# Altium PCB PCB2.PcbDoc
Units mm, origin at the board's own origin, x right, y up, seen from the top; angles counter-clockwise.
Board outline 144.78 x 62.86 mm, 2 copper layers (Top Layer, Bottom Layer); 16 components, 10 nets, 60 pads, 0 vias.
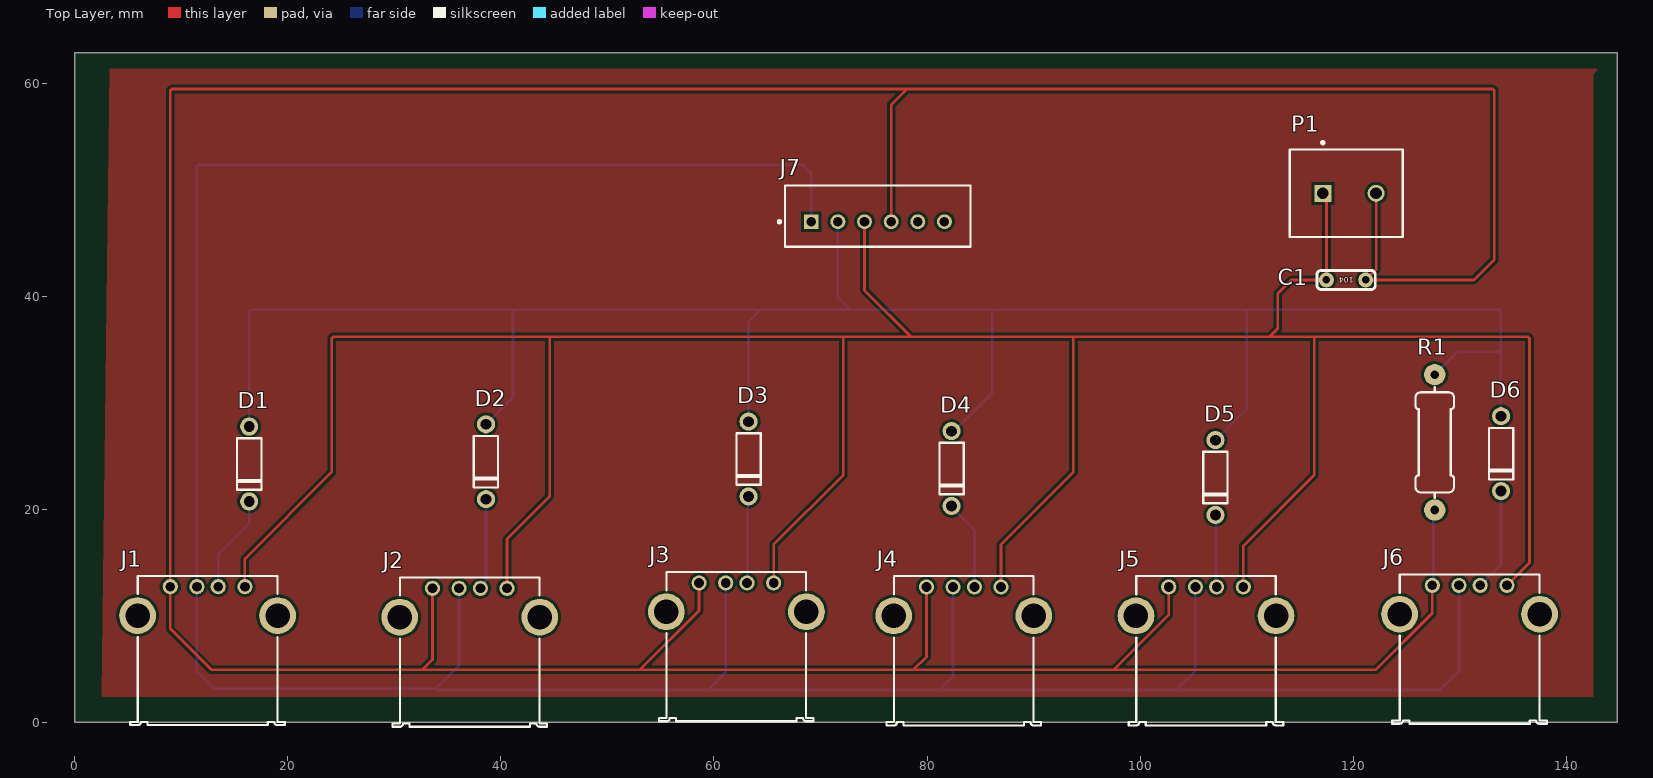
[diagram p0: Top Layer view]
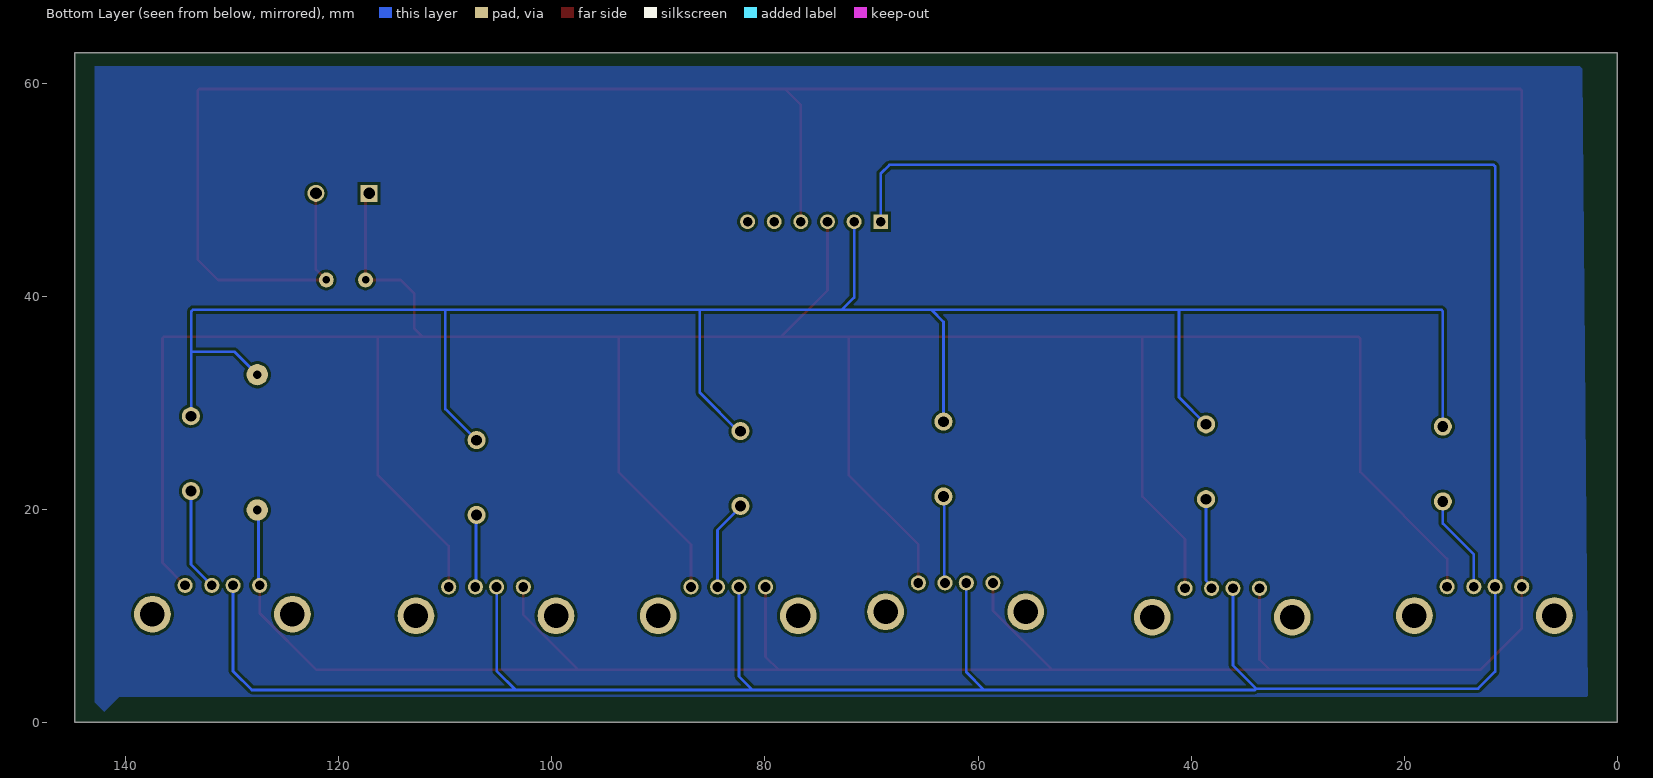
[diagram p1: Bottom Layer view, seen from below]
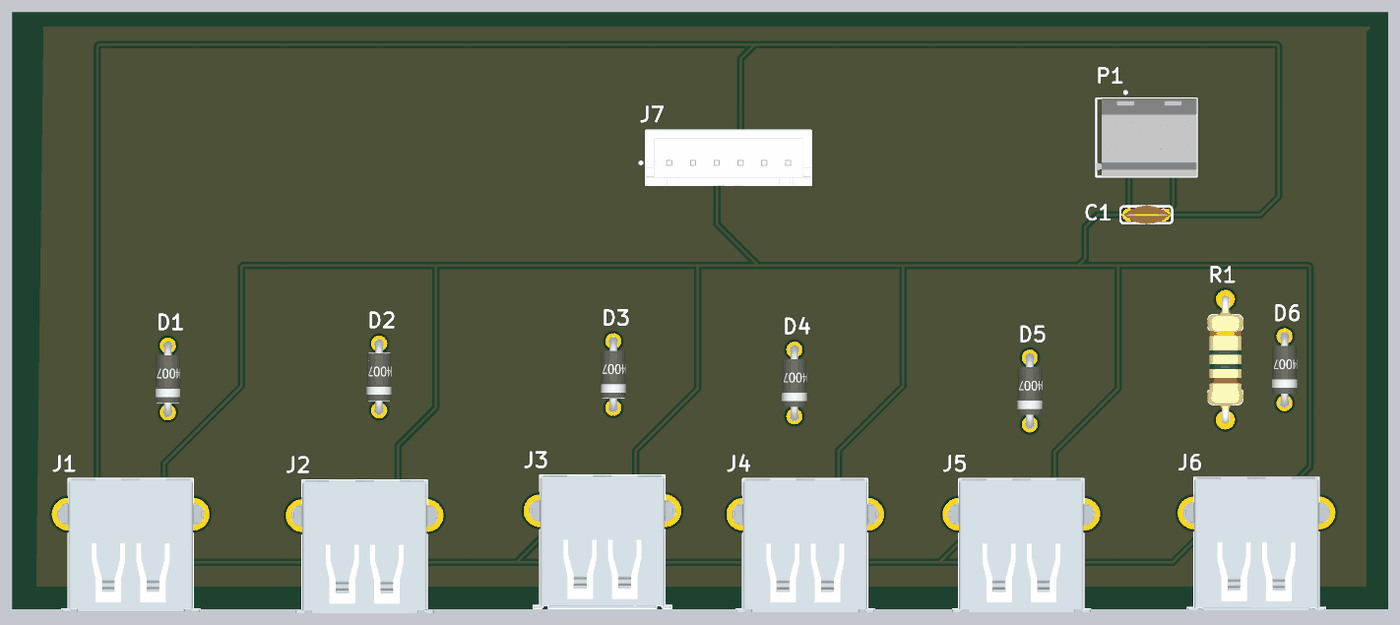
[diagram p2: 3D render of the assembled board from above, using the file's embedded part models]

## Layer stack, top to bottom
Top Solder: solder mask 0.0102, Solder Resist, Dk 3.5
Top Layer: signal copper 0.0356
Dielectric 1: dielectric 0.32, FR-4, Dk 4.8
Bottom Layer: signal copper 0.0356
Bottom Solder: solder mask 0.0102, Solder Resist, Dk 3.5

## Board outline
0,0 144.78,0 144.78,62.865 0,62.865

## Design rules (kind name [scope] priority, off if disabled: settings)
Clearance [All] p1: gap=0.254 ignorepadtopadclearanceinfootprint=FALSE except(0: Arc-Hole Track-Hole SMDPad-Hole THPad-Hole Via-Hole Fill-Hole Poly-Hole Region-Hole Text-Hole)
PolygonConnect [All] p1: connectstyle=Relief reliefconductorwidth=0.254 reliefentries=4 polygonreliefangle="90 Angle" airgapwidth=0.254
RoutingVias [All] p1: holewidth=0.711 width=1.27 viastyle="Through Hole" minholewidth=0.711 minwidth=1.27 maxholewidth=0.711 maxwidth=1.27
SolderMaskExpansion [All] p1: expansion=0.102 istentingtop=FALSE
Width [All] p1: maxlimit=0.254 minlimit=0.254 preferedwidth=0.254
30 further rules are at their usual default settings.

## Components (designator, comment, footprint, x,y, rotation, side; value= is the part's Value field where it differs from the comment)
C1 "Cap" "CAP 104" 121.92,41.529 r180 top value=100pF
D1 "Diode" "DIODE 4007" 16.383,26.543 r270 top
D2 "Diode" "DIODE 4007" 38.608,26.755 r270 top
D3 "Diode" "DIODE 4007" 63.246,27.009 r270 top (schematic designator D2)
D4 "Diode" "DIODE 4007" 82.296,26.12 r270 top
D5 "Diode" "DIODE 4007" 107.061,25.273 r270 top
D6 "Diode" "DIODE 4007" 133.858,27.517 r270 top
J1 "61400416021" 61400416021 12.48,6.753 r0 top
J2 "61400416021" 61400416021 37.084,6.604 r0 top
J3 "61400416021" 61400416021 62.103,7.112 r0 top
J4 "61400416021" 61400416021 83.439,6.731 r0 top
J5 "61400416021" 61400416021 106.172,6.731 r0 top
J6 "61400416021" 61400416021 130.903,6.88 r0 top
J7 "B6B-XH-A(LF)(SN)" FP-B6B-XH-A_LF_SN-MFG 75.378,47.515 r0 top
P1 "282836-2" TECO-282836-2_V 119.634,49.657 r0 top
R1 "Resistor" "Res 1/2WatT" 127.635,26.289 r90 top value=10K

## Footprints (in the part's own frame and the unit in brackets; to place one, negate y for a bottom-side part, rotate by r counter-clockwise, add the part's x,y. Pads: shape width x height; smd on the part's side, far side on the other; paste and mask are expansions set on the pad)
61400416021 [mm] "USB 2.0 Type A Horizontal"
  round 1.42 hole 0.92: 1(-3.5,5.99) 2(-1,5.99) 3(1,5.99) 4(3.5,5.99)
  round 3.45 hole 2.3: Shell(-6.57,3.28) Shell(6.57,3.28)
  silkscreen extent -7.25,-7 7.25,7, body extent -8,-7 8,7, height 7.63
"CAP 104" [mm] "Capasitor Troughole"
  round 1.4 hole 0.7: 1(0.762,0) 2(4.445,0)
  silkscreen extent -0.13,-0.89 5.33,0.89, body extent 0.08,-1 5,1, height 6.46
"DIODE 4007" [mm] "DIODE 4002"
  round 1.7 hole 1: 1(-1.225,0) 2(5.8,0)
  silkscreen extent -0.13,-1.14 4.7,1.14, body extent -1.61,-1.31 6.19,1.31, height 2.62
FP-B6B-XH-A_LF_SN-MFG [mm]
  rect 1.4x1.4 hole 0.9 paste-1000 mask+0: 1(-6.25,-0.525)
  round 1.4 hole 0.9 paste-1000 mask+0: 2(-3.75,-0.525) 3(-1.25,-0.525) 4(1.25,-0.525) 5(3.75,-0.525) 6(6.25,-0.525)
  silkscreen extent -9.35,-2.88 8.7,2.88, body extent -8.8,-2.98 8.8,2.98, height 0.25
"Res 1/2WatT" [mm]
  round 2 hole 0.8: 1(-6.35,0) 2(6.35,0)
  silkscreen extent -5.2,-1.8 5.2,1.8, body extent -6.72,-1.88 6.73,1.87, height 3.78
TECO-282836-2_V [mm] "Female Header, Pitch 5mm, 1 x 2 Position, Height 10mm"
  rect 1.6x1.6 hole 1.1: 1(-2.5,0)
  round 1.6 hole 1.1: 2(2.5,0)
  silkscreen extent -5.6,-4.1 5,4.87, body extent -5.6,-4.1 5,4.1, height 10

## Part data
C1: "Capacitor", LatestRevisionDate=17-Jul-2002, LatestRevisionNote="Re-released for DXP Platform.", PackageDescription="Radial Cap, Thru-Hole; 2 Leads; 0.3 in Pin Spacing", PackageReference=RAD-0.3, Published=8-Jun-2000, Publisher="Altium Limited"
D1 D2 D3 D4 D5 D6: "Default Diode", Code_JEDEC=DO-214-AB, LatestRevisionDate=17-Jul-2002, LatestRevisionNote="Re-released for DXP Platform.", PackageDescription="DO-214-AB/SMC; 2 C-Bend Leads; Body 7.9 x 5.9 mm, inc. leads (LxW)", PackageReference=SMC, PackageVersion=Sep-1996, Published=8-Jun-2000, Publisher="Altium Limited"
J1 J2 J3 J4 J5 J6: library part CMP-1502-03227-1, "USB 2.0 Type A Receptacle WR-COM, Horizontal, THT", Contact Resistance=20mOhm, Manufacturer="Wurth Elektronik", Operating Temperature=-40to105degC, Rated Current=1.5A, Working Voltage=30VAC, Connector Type=USB2.0TypeA, Datasheet URL=https://katalog.we-online.de/em/datasheet/61400416021.pdf, Gender=Receptacle, Manufacturer URL=http://www.we-online.de, Mounting Technology=THT, Orientation=Horizontal, Package Reference=61400416021, Packaging=Tray, Part Number=61400416021, Publisher=WurthElektronik
J7: library part CMP-17439-000076-1, "CONN HEADER VERT 6POS 2.5MM"
P1: library part CMP-1684-00017-1, "Female Header, Pitch 5 mm, 1 x 2 Position, Height 10 mm, Tail Length 3.5 mm, Rohs, Bulk", Color=Green, Current=13.5A, Manufacturer="TE Connectivity", Package Description="Female Header, Pitch 5 mm, 1 x 2 Position, Height 10 mm, Tail Length 3.5 mm", Package Reference=THD, Standard Package=300, Voltage=300V, 3D Model=282836-2.pdf, Category=Connectors,Interconnects, Clamp Material - Plating=Brass-NickelPlated, Contact Material - Plating=Brass-TinPlated, Datasheet URL=http://www.te.com.cn/commerce/DocumentDelivery/DDEController?Action=showdoc&DocId=Catalog+Section%7F1308389_EUROSTYLE_TERMINAL_BLOCKS%7F0607%7Fpdf%7FEnglish%7FENG_CS_1308389_EUROSTYLE_TERMINAL_BLOCKS_0607.pdf%7F282836-2, Dynamic Catalog=BuchananSeries, Family=TerminalBlocks-WiretoBoard, Featured Product=EurostyleTerminalBlockConnectors, Features=Interlocking(Side), Housing Material=Polyamide(PA66),Nylon6/6, Manufacturer URL=http://www.te.com, Mating Orientation=HorizontalwithBoard, Mounting Type=ThroughHole, Number of Levels=1, Other Names="5ULV-02B / A98076", Packaging=Bulk, Pitch="0.197\"(5.00mm)", Positions Per Level=2, Product Training Modules=Wire-to-BoardEurostyleTerminalBlocks, RoHS Information=282836-2StatementofCompliance, Screw Material - Plating=Brass-NickelPlated, Screw Thread=M3, Series=Buchanan, Torque - Screw=0.68Nm(6Lb-In), Wire Gauge=16-30AWG, Wire Termination=Screw-RisingCageClamp
R1: LatestRevisionDate=17-Jul-2002, LatestRevisionNote="Re-released for DXP Platform.", PackageDescription="Axial Device, Thru-Hole; 2 Leads; 0.3 in Pin Spacing", PackageReference=AXIAL-0.3, Published=8-Jun-2000, Publisher="Altium Limited"

## Nets (pads, with @x,y where several pads share a name; then routed paths per layer and width w, separated by ;. In a path a pad name is that pad's centre, name@x,y a point inside that pad or via, vN(x,y) a via of type N, cw(c..) or ccw(c..) an arc to the next point about the centre after c; other vN are vias at no path point)
NetC1_1: C1.1 J1.1 J2.1 J3.1 J4.1 J5.1 J6.1 J7.4 P1.2 R1.1 | length 394.1
  Top Layer w0.254: J2.1@33.782,12.396 J2.1 33.584,5.898 32.639,4.953 ; J3.1 58.603,10.484 53.072,4.953 ; J7.4 76.628,57.959 78.105,59.436 ; J4.1 79.939,6.152 78.74,4.953 ; J5.1 102.672,10.103 97.522,4.953 ; P1.2 122.134,42.505 C1.1 131.318,41.529 133.223,43.434 133.223,59.287 133.074,59.436 78.105,59.436 ; J6.1 127.403,10.252 122.104,4.953 97.522,4.953 ; 32.639,4.953 12.827,4.953 8.98,8.8 J1.1 8.98,59.287 9.129,59.436 78.105,59.436 ; 32.639,4.953 53.072,4.953 ; 53.072,4.953 78.74,4.953 ; 78.74,4.953 97.522,4.953
  Bottom Layer w0.254: J6.1 127.519,12.986 127.519,19.823 R1.1
NetC1_2: C1.2 J1.4 J2.4 J3.4 J4.4 J5.4 J6.4 J7.3 P1.1 | length 297.2
  Top Layer w0.254: J1.4 15.98,15.345 24.13,23.495 24.13,36.046 24.279,36.195 44.577,36.195 ; J2.4 40.584,17.216 44.577,21.209 44.577,36.195 ; J3.4 65.603,16.708 72.136,23.241 72.136,36.195 ; J7.3 74.128,40.553 78.486,36.195 ; J4.4 86.939,16.708 93.726,23.495 93.726,36.195 ; J5.4 109.672,16.581 116.332,23.241 116.332,36.195 ; P1.1 117.475,49.316 C1.2 114.173,41.529 112.903,40.259 112.903,36.957 112.141,36.195 ; J6.4 136.525,14.992 136.525,36.046 136.376,36.195 116.332,36.195 ; 44.577,36.195 72.136,36.195 ; 72.136,36.195 78.486,36.195 ; 78.486,36.195 93.726,36.195 ; 93.726,36.195 112.141,36.195 ; 112.141,36.195 116.332,36.195
NetD1_1: D1.1 D2.1 D4.1 D5.1 D6.1 J7.2 R1.2 | length 203.6
  Bottom Layer w0.254: D1.1 16.383,38.586 16.532,38.735 41.148,38.735 ; D2.1 41.148,30.52 41.148,38.735 ; 63.246,27.98 63.246,37.592 64.389,38.735 ; J7.2 71.628,39.878 72.771,38.735 ; D4.1@82.338,27.175 86.106,30.943 86.106,38.735 ; D5.1 109.982,29.419 109.982,38.735 ; R1.2 129.794,34.798 133.817,34.798 ; D6.1 133.817,28.783 133.817,34.798 ; 41.148,38.735 64.389,38.735 ; 64.389,38.735 72.771,38.735 ; 72.771,38.735 86.106,38.735 ; 86.106,38.735 109.982,38.735 ; 109.982,38.735 133.668,38.735 133.817,38.586 133.817,34.798
NetD1_2: D1.2 J1.3 | length 9.2
  Bottom Layer w0.254: J1.3 13.48,15.766 16.383,18.669 D1.2
NetD2_2: D2.2 J2.3 | length 8.6
  Bottom Layer w0.254: J2.3 38.084,12.802 38.608,13.326 D2.2
NetD3_2: D3.2 J3.3 | length 7.9
  Bottom Layer w0.254: J3.3 63.175,13.173 63.175,20.884 D3.2@63.246,20.955
NetD4_2: D4.2 J4.3 | length 8.2
  Bottom Layer w0.254: D4.2@82.423,20.066 84.439,18.05 J4.3
NetD5_2: D5.2 J5.3 | length 6.8
  Bottom Layer w0.254: D5.2 107.116,19.417 107.116,12.776 J5.3
NetD6_2: D6.2 J6.3 | length 9.7
  Bottom Layer w0.254: J6.3 133.858,14.825 D6.2
NetJ1_2: J1.2 J2.2 J3.2 J4.2 J5.2 J6.2 J7.1 | length 279.6
  Bottom Layer w0.254: J2.2 36.084,5.35 33.909,3.175 ; J3.2 61.103,4.715 59.436,3.048 ; J7.1 69.128,51.522 68.326,52.324 11.629,52.324 11.48,52.175 J1.2 11.48,4.776 13.081,3.175 33.909,3.175 ; J4.2 82.439,4.334 81.153,3.048 ; J5.2 105.172,4.842 103.378,3.048 ; J6.2 129.903,4.808 128.143,3.048 103.378,3.048 ; 33.909,3.175 34.036,3.048 59.436,3.048 ; 59.436,3.048 81.153,3.048 ; 81.153,3.048 103.378,3.048
pads on no net: D3.1 J1.Shell J2.Shell J3.Shell J4.Shell J5.Shell J6.Shell J7.5 J7.6

## Polygon pours and split planes (outlines as drawn)
no net on Bottom Layer "NONET_L02_P000" (solid, pour order 0): 3.302,61.341 3.556,61.595 142.875,61.595 142.875,1.905 141.986,1.016 140.589,2.413 2.794,2.413
no net on Top Layer "NONET_L01_P001" (solid, pour order 1): 3.302,61.341 143.002,61.341 142.494,60.833 142.494,2.413 2.54,2.413

## Text inside footprints (layer, text, board x,y; h text height)
C1: Top Overlay "104" at 120.015,41.783 h0.5 r180
J1: Mechanical 2 "PCB Edge" at 10.28,-1.467 h0.81
J2: Mechanical 2 "PCB Edge" at 34.884,-1.616 h0.81
J3: Mechanical 2 "PCB Edge" at 59.903,-1.108 h0.81
J4: Mechanical 2 "PCB Edge" at 81.239,-1.489 h0.81
J5: Mechanical 2 "PCB Edge" at 103.972,-1.489 h0.81
J6: Mechanical 2 "PCB Edge" at 128.703,-1.34 h0.81